# Altium PCB gpn_panel.PcbDoc
Units mm, origin at the board's own origin, x right, y up, seen from the top; angles counter-clockwise.
Board outline 315.5 x 164 mm, 2 copper layers (Top Layer, Bottom Layer); 4 components, 0 nets, 4 pads, 0 vias.
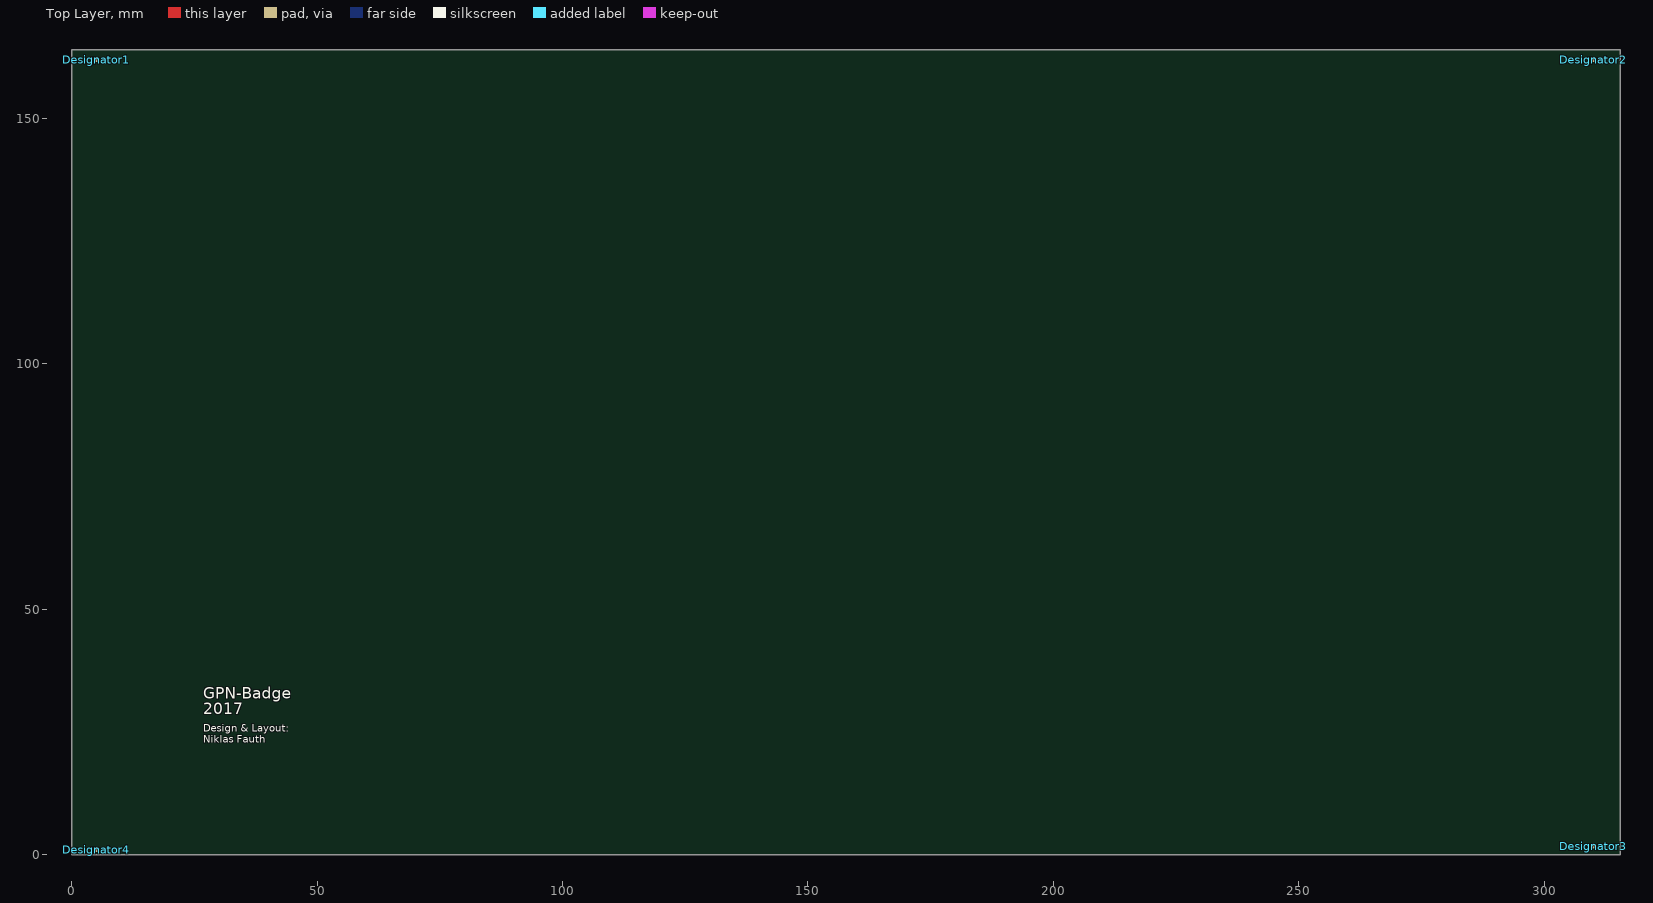
[diagram p0: Top Layer view]
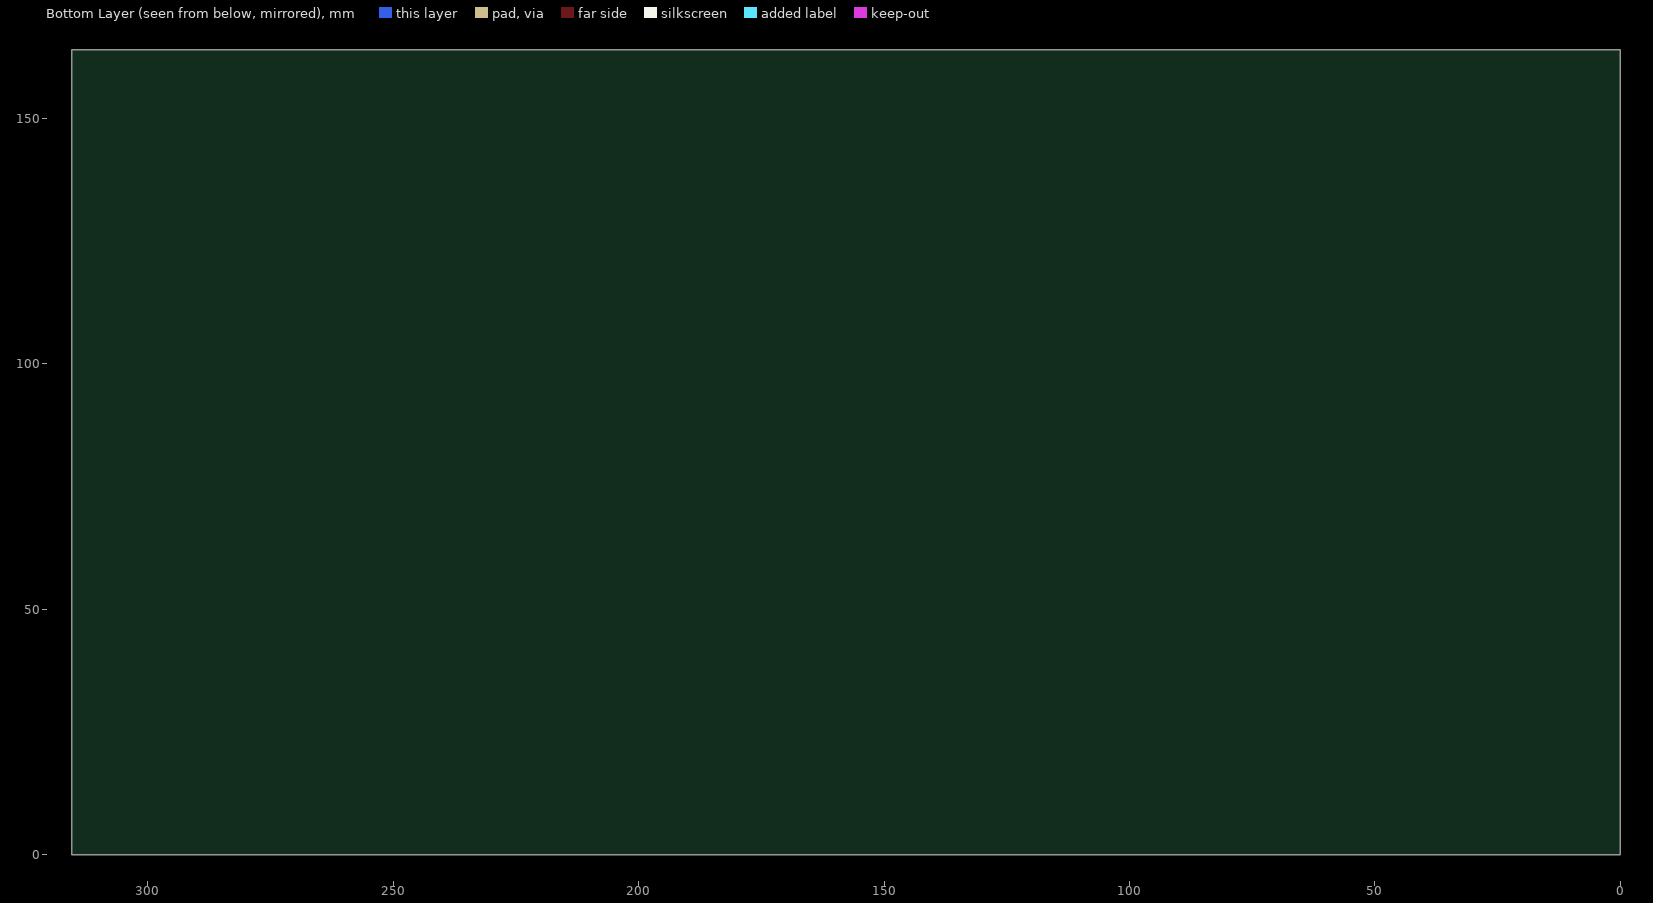
[diagram p1: Bottom Layer view, seen from below]

## Layer stack, top to bottom
Top Solder: solder mask 0.0102, Solder Resist, Dk 3.5
Top Layer: signal copper 0.0356
Dielectric 1: dielectric 0.32, FR-4, Dk 4.8
Bottom Layer: signal copper 0.0356
Bottom Solder: solder mask 0.0102, Solder Resist, Dk 3.5

## Board outline
0,0 0,164 315.5,164 315.5,0

## Design rules (kind name [scope] priority, off if disabled: settings)
Clearance [All] p1: gap=0.254 ignorepadtopadclearanceinfootprint=FALSE except(0: Arc-Hole Track-Hole SMDPad-Hole THPad-Hole Via-Hole Fill-Hole Poly-Hole Region-Hole Text-Hole)
PolygonConnect [All] p1: connectstyle=Relief reliefconductorwidth=0.254 reliefentries=4 polygonreliefangle="90 Angle" airgapwidth=0.254
RoutingVias [All] p1: holewidth=0.711 width=1.27 viastyle="Through Hole" minholewidth=0.711 minwidth=1.27 maxholewidth=0.711 maxwidth=1.27
SolderMaskExpansion [All] p1: expansion=0.102
Width [All] p1: maxlimit=0.254 minlimit=0.254 preferedwidth=0.254
30 further rules are at their usual default settings.

## Components (designator, comment, footprint, x,y, rotation, side; value= is the part's Value field where it differs from the comment)
Designator1 "Comment" Fiducial#1 5,162 r0 top
Designator2 "Comment" Fiducial#2 309,162 r0 top
Designator3 "Comment" Fiducial#1 310,1.75 r0 top
Designator4 "Comment" Fiducial#1 5,1 r0 top

## Footprints (in the part's own frame and the unit in brackets; to place one, negate y for a bottom-side part, rotate by r counter-clockwise, add the part's x,y. Pads: shape width x height; smd on the part's side, far side on the other; paste and mask are expansions set on the pad)
Fiducial#1 [mm] "Fiducial"
  round 1 smd paste-1 mask+0.5: ""(0,0)
  body extent -0.49,-0.5 0.5,0.5, height 0.5
Fiducial#2 [mm] "Fiducial"
  round 1 smd paste-1 mask+0.5: ""(1,0)
  body extent -0.49,-0.5 0.5,0.5, height 0.5

## Nets (pads, with @x,y where several pads share a name; then routed paths per layer and width w, separated by ;. In a path a pad name is that pad's centre, name@x,y a point inside that pad or via, vN(x,y) a via of type N, cw(c..) or ccw(c..) an arc to the next point about the centre after c; other vN are vias at no path point)
pads on no net: Designator1. Designator2. Designator3. Designator4.

## Silkscreen, mask and mechanical layers (free items; w line width, h text height)
Top Overlay:
  text "GPN-Badge" at 26.75,31 h4
  text "2017" at 26.75,27.75 h4
  text "Design & Layout:" at 26.75,24.5 h2.5
  text "Niklas Fauth" at 26.75,22.25 h2.5
Mechanical 1:
  the board outline again, w0.15
Mechanical 30:
  text "1.6mm Cutter" at -20,150 h1.52
Mechanical 31:
  lines w0.2: -20,3.5 315.5,3.5 ; -20,160 315.5,160
  text "V-Groove" at -19.5,161 h1.52
  text "V-Groove" at -19.5,4.5 h1.52

## Dimensions
322.258,3.476 to 321.008,159.976 on Mechanical 1
0,169.75 to 315.5,169.25 on Mechanical 1

## Panel: embedded boards
"gpn-badge.PcbDoc" at 0,3.5, 1 rows x 9 columns, spacing 63.5 x 35.255, rotation 0